# EAGLE board miniframeV2 (EAGLE 5.10)
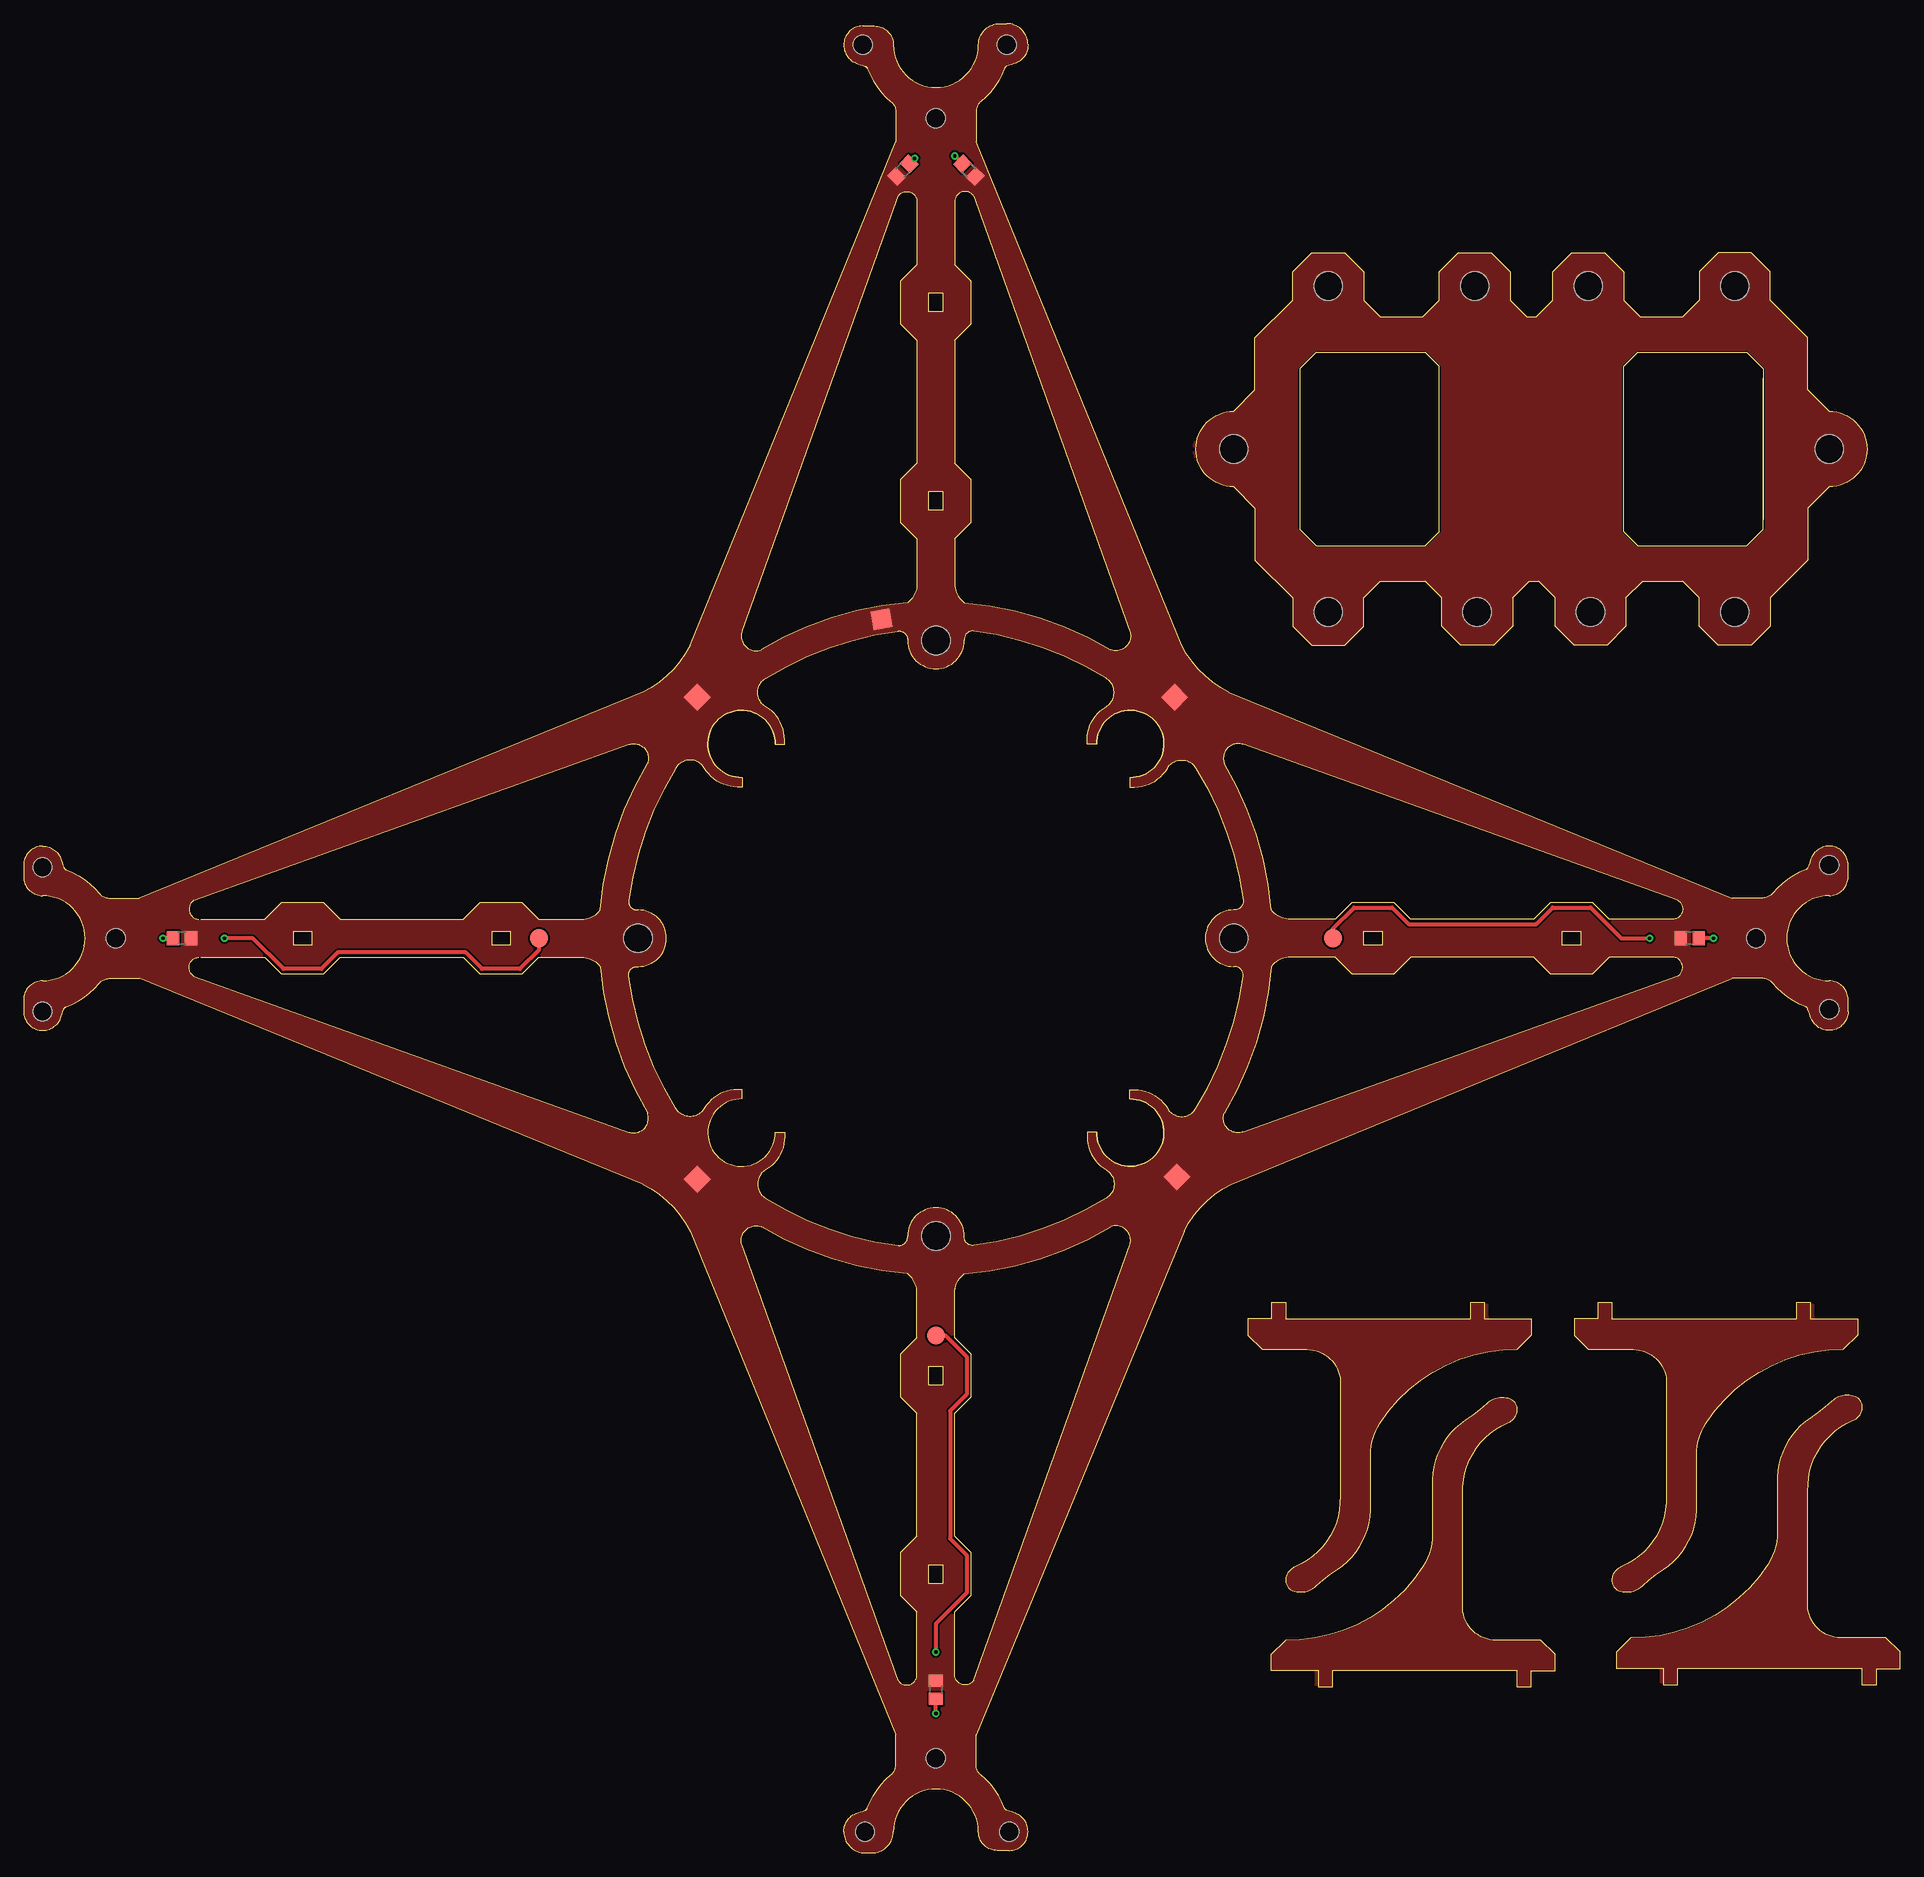
[diagram p0: board, top side]
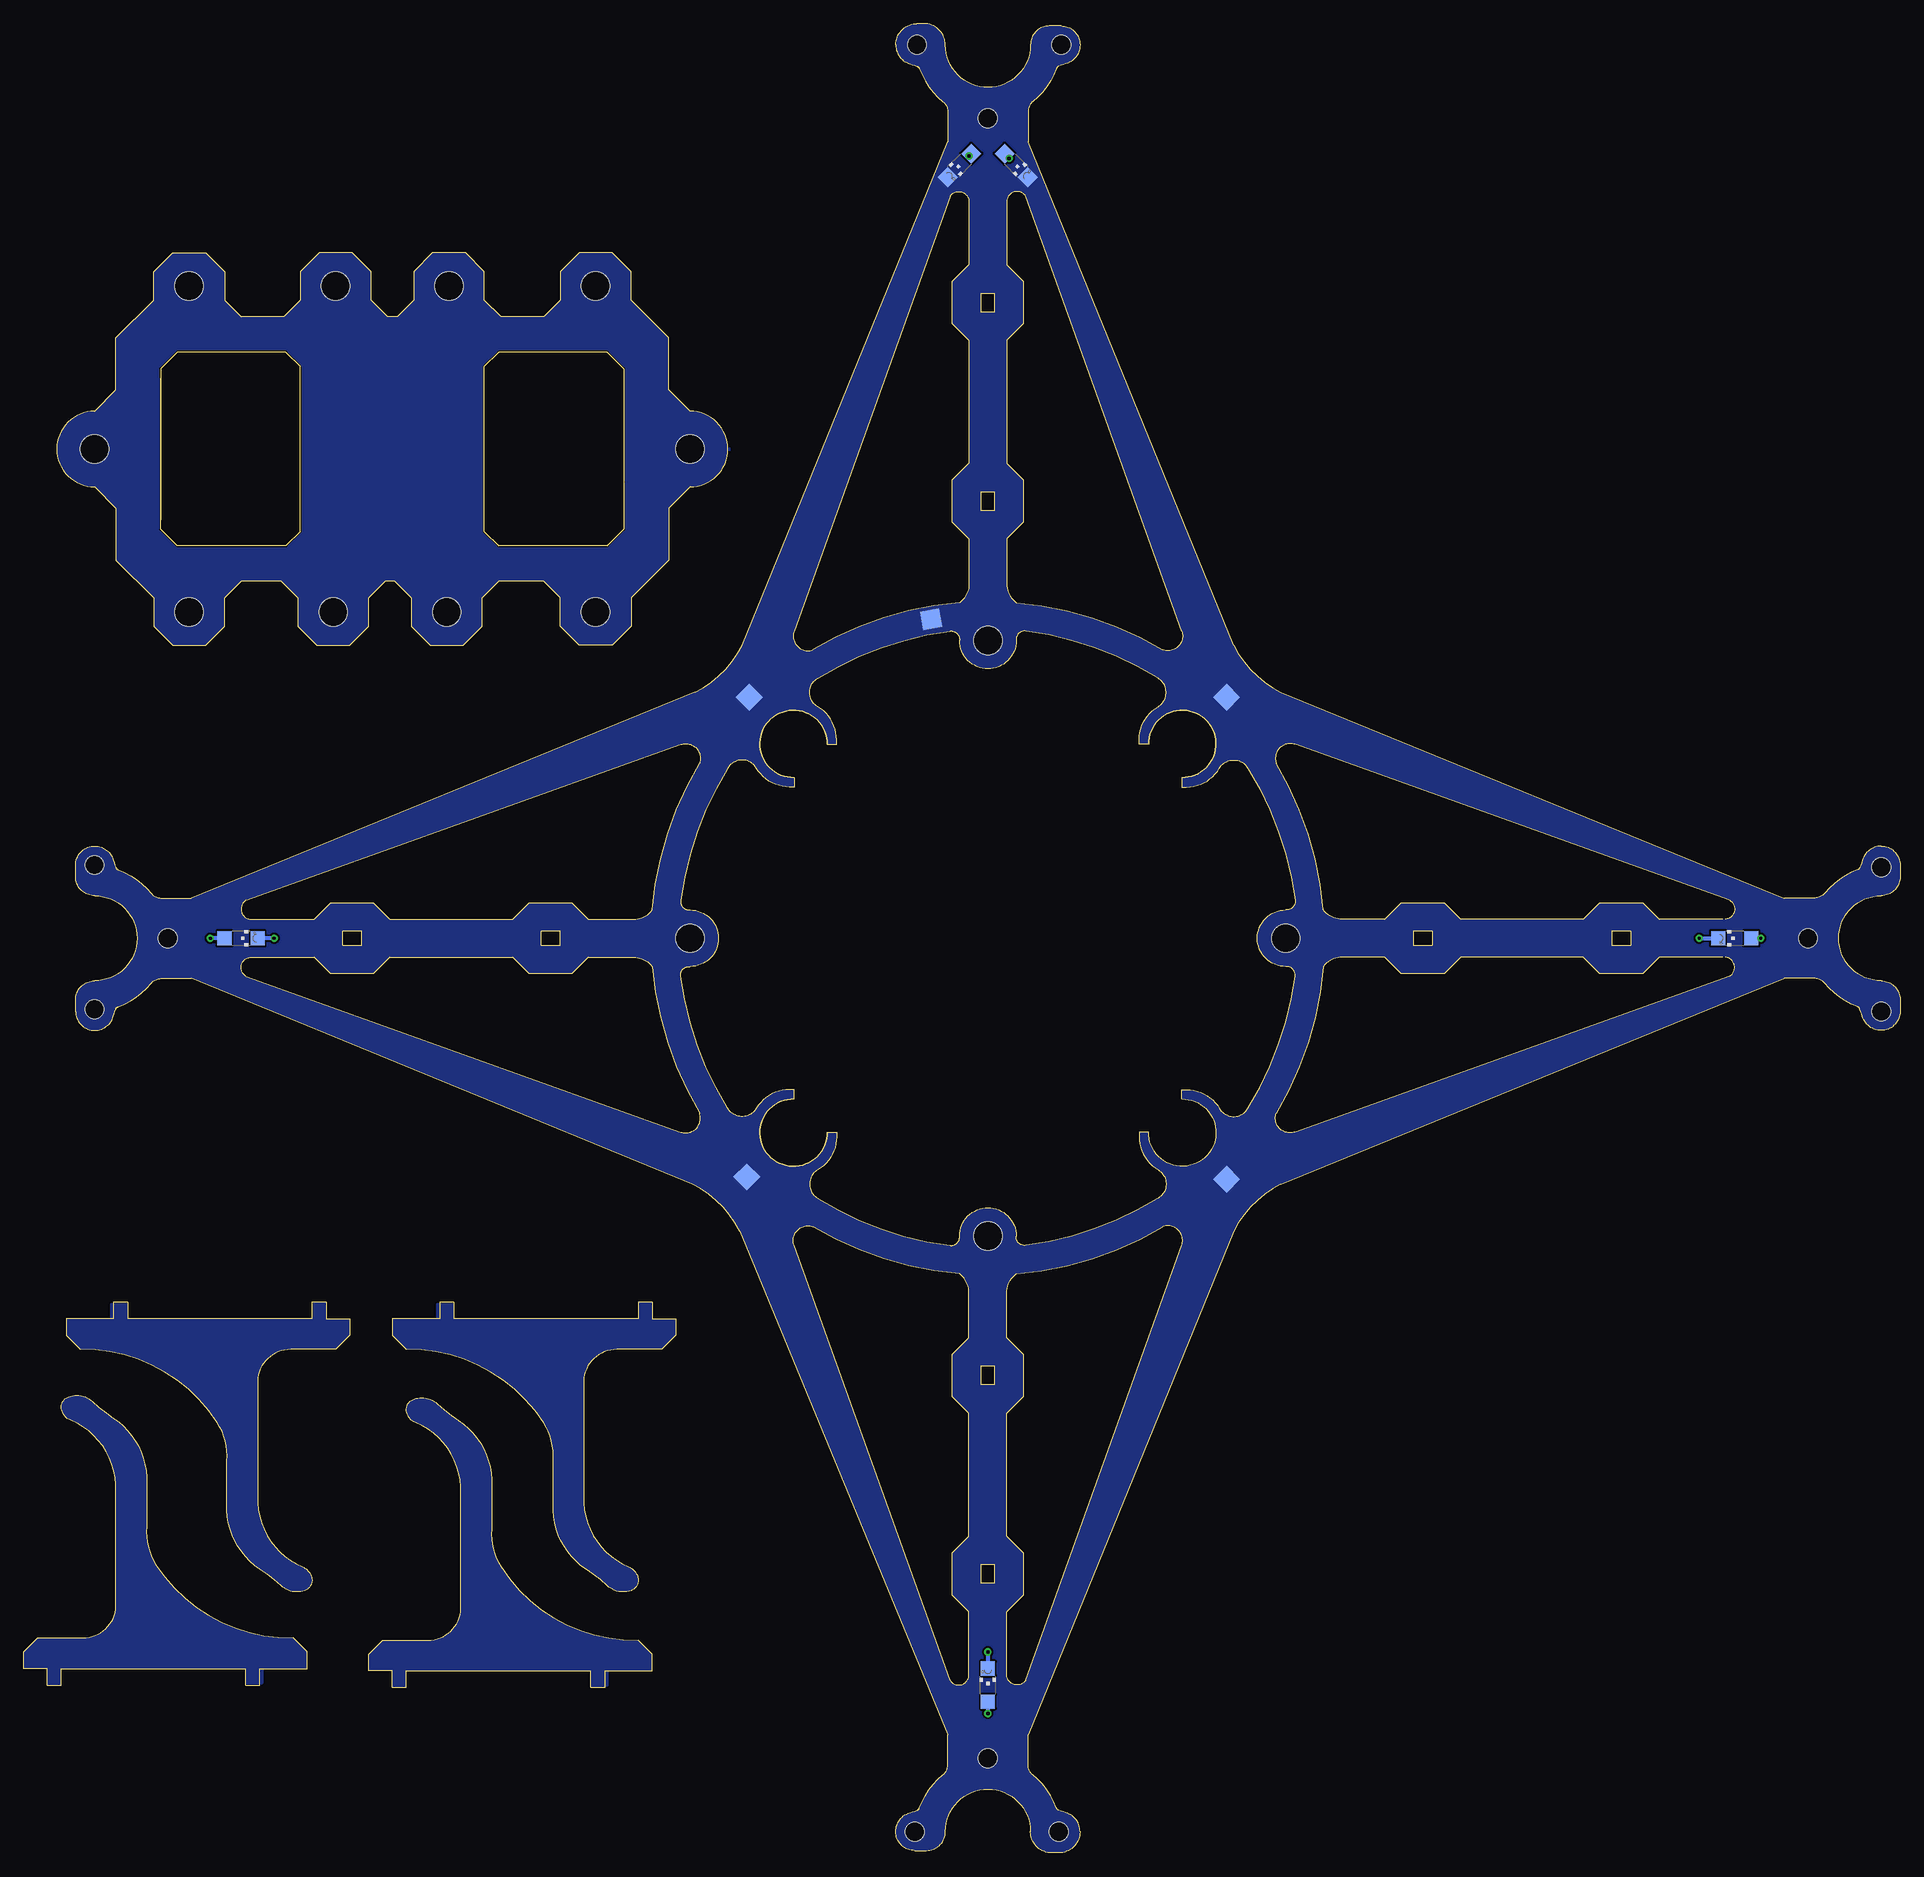
[diagram p1: board, bottom side, seen from below]

Size 198.5 x 193.5 mm. Coordinates in mm from the lower left corner, seen from the top.
Outline: 76,113.75 arc-272 79.5,117.25
Outline: 18.5,98.75 arc-141 18,100.75 64,117.25 arc-129 66,115.25 arc26 61,99.75 arc-53 59,98.75
Outline: 76,113.75 76,112.75 75.5,112.75 arc-59 72,114.75 arc119 69,114.75 arc24 64,100.75 arc103 65,99.75 arc-180 65,93.75 arc103 64,92.75 arc24 69,78.75 arc119 72,78.75 arc-59 75.5,80.75 76,80.75 76,79.75 arc272 79.5,76.25 80.5,76.25 80.5,75.75 arc-59 78.5,72.25 arc119 78.5,69.25 arc24 92.5,64.25 arc103 93.5,65.25 arc-180 99.5,65.25 arc103 100.5,64.25 arc24 114.5,69.25 arc119 114.5,72.25 arc-59 112.5,75.75 112.5,76.25 113.5,76.25
Outline: 18.5,94.75 arc141 18,92.75 64,76.25 arc129 66,78.25 arc-26 61,93.75 arc53 59,94.75
Outline: 2,87 arc-90 0,89 0,90.25 arc-90 2,92.25 arc180 2,101.25 arc-90 0,103.25 0,104.5 arc-90 2,106.5 arc-74 4,105 arc4 4.25,104.25 arc49 4.5,104 arc-30 8,101.5 arc48 9,101 12.25,101 65.5,122.75 arc36 70.5,127.75 92.25,181 92.25,184.25 arc48 91.75,185.25 arc-30 89.25,188.75 arc49 89,189 arc4 88.25,189.25
Outline: 2,87 arc74 4,88.5
Outline: 113.5,76.25 arc272 117,79.75
Outline: 117,79.75 arc-272 113.5,76.25
Outline: 117,79.75 117,80.75 117.5,80.75 arc-59 121,78.75 arc119 124,78.75 arc24 129,92.75 arc103 128,93.75 arc-180 128,99.75 arc103 129,100.75 arc24 124,114.75 arc119 121,114.75 arc-59 117.5,112.75 117,112.75 117,113.75
Outline: 117,113.75 arc272 113.5,117.25
Outline: 113.5,117.25 arc-272 117,113.75
Outline: 113.5,117.25 112.5,117.25 112.5,117.75 arc-59 114.5,121.25 arc119 114.5,124.25 arc24 100.5,129.25 arc103 99.5,128.25 arc-180 93.5,128.25 arc103 92.5,129.25 arc24 78.5,124.25 arc119 78.5,121.25 arc-59 80.5,117.75 80.5,117.25 79.5,117.25
Outline: 79.5,117.25 arc272 76,113.75
Outline: 191,87 arc90 193,89 193,90.25 arc90 191,92.25 arc-180 191,101.25 arc90 193,103.25 193,104.5 arc90 191,106.5 arc74 189,105 arc-4 188.75,104.25 arc-49 188.5,104 arc30 185,101.5 arc-48 184,101 180.75,101 127.5,122.75 arc-36 122.5,127.75 100.75,181 100.75,184.25 arc-48 101.25,185.25 arc30 103.75,188.75 arc-49 104,189 arc-4 104.75,189.25 arc74 106.25,191.25 arc90 104,193.5 103.25,193.5 arc90 101,191.25 arc-180 92,191.25 arc90 90,193.25 88.75,193.25 arc90 86.75,191.25
Outline: 191,87 arc-74 189,88.5
Outline: 106.25,2.25 arc-90 104.25,0.25 103,0.25 arc-90 101,2.25 arc180 92,2.25 arc-90 89.75,0 89,0 arc-90 86.75,2.25 arc-74 88.25,4.25 arc4 89,4.5 arc49 89.25,4.75 arc-30 91.75,8.25 arc48 92.25,9.25 92.25,12.5 70.5,65.75 arc36 65.5,70.75 12.25,92.5 9,92.5 arc48 8,92 arc-30 4.5,89.5 arc49 4.25,89.25 arc4 4,88.5
Outline: 106.25,2.25 arc74 104.75,4.25
Outline: 86.75,191.25 arc74 88.25,189.25
Outline: 18.75,98.75 25.5,98.75 27.25,100.5 31.75,100.5 33.5,98.75 46.5,98.75 48.25,100.5 52.75,100.5 54.5,98.75 59.25,98.75
Outline: 18.75,94.75 25.5,94.75 27.25,93 31.75,93 33.5,94.75 46.5,94.75 48.25,93 52.75,93 54.5,94.75 59.25,94.75
Outline: 86.75,191.25 arc74 88.25,189.25
Outline: 2,87 arc74 4,88.5
Outline: 106.25,2.25 arc74 104.75,4.25
Outline: 104.75,4.25 arc-4 104,4.5 arc-49 103.75,4.75 arc30 101.25,8.25 arc-48 100.75,9.25 100.75,12.5 122.75,65.75 arc-36 127.75,70.75 180.75,92.5 184,92.5 arc-48 185,92 arc30 188.5,89.5 arc-49 188.75,89.25 arc-4 189,88.5
Outline: 191,87 arc-74 189,88.5
Outline: 184,156 184,140 182.25,138.25 170.75,138.25 169.25,139.75 169.25,157.25 170.75,158.75 182.25,158.75 184,157 184,141
Outline: 92.5,18.25 76,64.25 arc-129 78,66.25 arc26 93.5,61.25 arc-53 94.5,59.25 94.5,54.5 92.75,52.75 92.75,48.25 94.5,46.5 94.5,33.5 92.75,31.75 92.75,27.25 94.5,25.5 94.5,18.75 arc-141 92.5,18.25
Outline: 100.5,18.25 117,64.25 arc129 115,66.25 arc-26 99.5,61.25 arc53 98.5,59.25 98.5,54.5 100.25,52.75 100.25,48.25 98.5,46.5 98.5,33.5 100.25,31.75 100.25,27.25 98.5,25.5 98.5,18.75 arc141 100.5,18.25
Outline: 175,92.75 129,76.25 arc-129 127,78.25 arc26 132,93.75 arc-53 134,94.75 138.75,94.75 140.5,93 145,93 146.75,94.75 159.75,94.75 161.5,93 166,93 167.75,94.75 174.5,94.75 arc-141 175,92.75
Outline: 175,100.75 129,117.25 arc129 127,115.25 arc-26 132,99.75 arc53 134,98.75 138.75,98.75 140.5,100.5 145,100.5 146.75,98.75 159.75,98.75 161.5,100.5 166,100.5 167.75,98.75 174.5,98.75 arc141 175,100.75
Outline: 100.5,175.25 117,129.25 arc-129 115,127.25 arc26 99.5,132.25 arc-53 98.5,134.25 98.5,139 100.25,140.75 100.25,145.25 98.5,147 98.5,160 100.25,161.75 100.25,166.25 98.5,168 98.5,174.75 arc-141 100.5,175.25
Outline: 92.5,175.25 arc-141 94.5,174.75 94.5,168 92.75,166.25 92.75,161.75 94.5,160 94.5,147 92.75,145.25 92.75,140.75 94.5,139 94.5,134.25 arc-53 93.5,132.25 arc26 78,127.25 arc-129 76,129.25 92.5,175.25
Outline: 28.5,97.5 28.5,96 30.5,96 30.5,97.5 28.5,97.5
Outline: 49.5,97.5 49.5,96 51.5,96 51.5,97.5 49.5,97.5
Outline: 95.75,28.5 97.25,28.5 97.25,30.5 95.75,30.5 95.75,28.5
Outline: 95.75,49.5 97.25,49.5 97.25,51.5 95.75,51.5 95.75,49.5
Outline: 164.75,96 164.75,97.5 162.75,97.5 162.75,96 164.75,96
Outline: 143.75,96 143.75,97.5 141.75,97.5 141.75,96 143.75,96
Outline: 97.25,165 95.75,165 95.75,163 97.25,163 97.25,165
Outline: 97.25,144 95.75,144 95.75,142 97.25,142 97.25,144
Outline: 132,58.25 133.5,58.25 133.5,56.5 153,56.5 153,58.25 154.5,58.25 154.5,56.5 159.5,56.5 159.5,54.75 158,53.25 arc58 143.5,45.5 arc38 142.5,41.5 142.5,36.25 arc-54 139,30 arc8 136.75,28.25 arc-63 134.25,27.75 arc-78 133.5,29 arc-62 134.5,30.25 arc69 139.25,37.75 139.25,50.25 arc81 135.75,53.25 131,53.25 129.5,54.75 129.5,56.5 132,56.5 132,58.25
Outline: 128,144.5 130.25,142.25 130.25,136.75 134.25,132.75 134.25,129.75 136.25,127.75 139.75,127.75 141.75,129.75 141.75,132.75 143.5,134.5 148.25,134.5 150,132.75 150,129.75 152,127.75 155.5,127.75 157.5,129.75 157.5,132.75 159.25,134.5 160.25,134.5 162,132.75 162,129.75 164,127.75 167.5,127.75 169.5,129.75 169.5,132.75 171.25,134.5 175.5,134.5 177.25,132.75 177.25,129.75 179.25,127.75 182.75,127.75 184.75,129.75 184.75,132.75 188.75,136.75 188.75,142.25 191,144.5 arc180 191,152.5 188.75,154.75 188.75,160.25 184.75,164.25 184.75,167.25 182.75,169.25 179.25,169.25 177.25,167.25 177.25,164.25 175.5,162.5 171,162.5 169.25,164.25 169.25,167.25 167.25,169.25 163.75,169.25 161.75,167.25 161.75,164.25 160,162.5 159,162.5 157.25,164.25 157.25,167.25 155.25,169.25 151.75,169.25 149.75,167.25 149.75,164.25 148,162.5 143.5,162.5 141.75,164.25 141.75,167.25 139.75,169.25 136.25,169.25 134.25,167.25 134.25,164.25 130.25,160.25 130.25,154.75 128,152.5 arc180 128,144.5
Outline: 136.75,158.75 135,157 135,140 136.75,138.25 148.25,138.25 149.75,139.75 149.75,157.25 148.25,158.75 136.75,158.75
Outline: 159.5,17.5 158,17.5 158,19.25 138.5,19.25 138.5,17.5 137,17.5 137,19.25 132,19.25 132,21 133.5,22.5 arc58 148,30.25 arc38 149,34.25 149,39.5 arc-54 152.5,45.75 arc8 154.75,47.5 arc-63 157.25,48 arc-78 158,46.75 arc-62 157,45.5 arc69 152.25,38 152.25,25.5 arc81 155.75,22.5 160.5,22.5 162,21 162,19.25 159.5,19.25 159.5,17.5
Outline: 166.5,58.25 168,58.25 168,56.5 187.5,56.5 187.5,58.25 189,58.25 189,56.5 194,56.5 194,54.75 192.5,53.25 arc58 178,45.5 arc38 177,41.5 177,36.25 arc-54 173.5,30 arc8 171.25,28.25 arc-63 168.75,27.75 arc-78 168,29 arc-62 169,30.25 arc69 173.75,37.75 173.75,50.25 arc81 170.25,53.25 165.5,53.25 164,54.75 164,56.5 166.5,56.5 166.5,58.25
Outline: 196,17.75 194.5,17.75 194.5,19.5 175,19.5 175,17.75 173.5,17.75 173.5,19.5 168.5,19.5 168.5,21.25 170,22.75 arc58 184.5,30.5 arc38 185.5,34.5 185.5,39.75 arc-54 189,46 arc8 191.25,47.75 arc-63 193.75,48.25 arc-78 194.5,47 arc-62 193.5,45.75 arc69 188.75,38.25 188.75,25.75 arc81 192.25,22.75 197,22.75 198.5,21.25 198.5,19.5 196,19.5 196,17.75
Copper layers (1*16): Top 0.035mm / dielectric 1.5mm / Bottom 0.035mm
Design rules "default *": minimum track width 10mil, minimum drill 24mil, track to track 8mil, track to pad 8mil, pad to pad 8mil, via to via 8mil, smd to smd 8mil, copper to edge 1mil, drill to drill 8mil, minimum pad ring 10mil, minimum via ring 8mil, stop-mask expansion 4mil, vias tented up to drill 0mil, thermal gap 10mil
Holes 3 mm at 65,96.75 96.5,65.25 128,96.75 96.5,128.25 128,148.5 191,148.5 138,165.75 181,165.75 138,131.25 181,131.25 153.5,165.75 165.5,165.75 165.75,131.25 153.75,131.25
Holes 2 mm at 2,104.25 9.75,96.75 2,89 89,2.25 96.5,10 104.25,2.25 191,89.25 183.25,96.75 191,104.5 88.75,191.25 96.5,183.5 104,191.25
tRestrict: area 135,138.2 to 149.8,158.8; area 169.2,138.2 to 184,158.8
bRestrict: area 135,138.2 to 149.8,158.8; area 169.2,138.2 to 184,158.8

## Footprints (pad centres in the part's own frame; a part is rotated, then mirrored left to right if it is on the bottom)
TP20SQ = smd 2 x 2: TP 0,0
CHIPLED_1206 = smd 1.5 x 1.5: A 0,-1.75; C 0,1.75
R0805 = smd 1.3 x 1.5: 1 -0.95,0; 2 0.95,0
TP19R = smd 1.9 x 1.9: TP 0,0

## Placement (x,y rotation side)
GND  TPTP20SQ  [TP20SQ]  102.5,130.5 10 bottom
GND4  TPTP20SQ  [TP20SQ]  71.25,71.25 45 bottom
GND5  TPTP20SQ  [TP20SQ]  122,71.5 45 bottom
GND6  TPTP20SQ  [TP20SQ]  121.75,122.25 45 bottom
GND7  TPTP20SQ  [TP20SQ]  71.25,122.25 45 bottom
LB  [CHIPLED_1206]  96.5,17.75 0 bottom
LF1  [CHIPLED_1206]  93.5,178.5 225 bottom
LF2  [CHIPLED_1206]  99.5,178.5 135 bottom
LL  [CHIPLED_1206]  175.5,96.75 270 bottom
LR  [CHIPLED_1206]  17.5,96.75 90 bottom
R1  330R  [R0805]  100,178 315 top
R2  330R  [R0805]  93,178 225 top
R3  330R  [R0805]  16.75,96.75 0 top
R4  330R  [R0805]  176.25,96.75 180 top
R5  330R  [R0805]  96.5,17.25 90 top
TLB  TPSQTP19R  [TP19R]  96.5,54.75 0 top
TLL  TPSQTP19R  [TP19R]  138.5,96.75 0 top
TLR  TPSQTP19R  [TP19R]  54.5,96.75 0 top
VCC  TPTP20SQ  [TP20SQ]  90.75,130.5 100 top
VCC1  TPTP20SQ  [TP20SQ]  71.25,71.25 45 top
VCC2  TPTP20SQ  [TP20SQ]  122,71.5 45 top
VCC3  TPTP20SQ  [TP20SQ]  121.75,122.25 45 top
VCC4  TPTP20SQ  [TP20SQ]  71.25,122.25 45 top

## Library data of the parts
GND GND4-GND7 TLB TLL TLR VCC VCC1-VCC4 = testpad
LB LF1 LF2 LL LR = led
R1-R5 = rcl

## Nets
GND: GND4.TP GND5.TP GND6.TP GND7.TP GND.TP LF1.C LF2.C
LB: LB.C TLB.TP
LL: LL.C TLL.TP
LR: LR.C TLR.TP
N$1: LF1.A R2.1
N$2: LF2.A R1.1
N$3: LR.A R3.1
N$4: LL.A R4.1
N$5: LB.A R5.1
VCC: R1.2 R2.2 R3.2 R4.2 R5.2 VCC1.TP VCC2.TP VCC3.TP VCC4.TP VCC.TP

## Tracks (layer width: path | path; a pad name or v marks a point on that pad's centre or on a via)
GND
  pour Bottom (no thermals): -25.75,217 -25.75,-9.75 222.5,-9.75 222.5,214.5 122.5,214.5
LB  (via drill 0.36)
  Top 0.406: v96.5,21.25 96.5,24.25 99.75,27.5 99.75,31.5 98,33.25 98,46.75 99.75,48.5 99.75,52.5 97.5,54.75 TLB.TP
  Bottom 0.406: v96.5,21.25 LB.C
LL  (via drill 0.36)
  Top 0.406: v172,96.75 169,96.75 165.75,100 161.75,100 160,98.25 146.5,98.25 144.75,100 140.75,100 138.5,97.75 TLL.TP
  Bottom 0.406: v172,96.75 LL.C
LR  (via drill 0.36)
  Top 0.406: v21.25,96.75 24.25,96.75 27.5,93.5 31.5,93.5 33.25,95.25 46.75,95.25 48.5,93.5 52.5,93.5 54.5,95.5 TLR.TP
  Bottom 0.406: v21.25,96.75 LR.C
N$1  (via drill 0.36)
  Top 0.406: R2.1 v94.25,179.25 | v94.25,179.25
  Bottom 0.406: v94.25,179.25 LF1.A
N$2  (via drill 0.36)
  Top 0.406: R1.1 v98.5,179.5 | v98.5,179.5
  Bottom 0.406: v98.5,179.5 LF2.A
N$3  (via drill 0.36)
  Top 0.406: v14.75,96.75 R3.1
  Bottom 0.406: LR.A v14.75,96.75
N$4  (via drill 0.36)
  Top 0.406: v178.75,96.75 R4.1
  Bottom 0.406: LL.A v178.75,96.75
N$5  (via drill 0.36)
  Top 0.406: v96.5,14.75 R5.1
  Bottom 0.406: LB.A v96.5,14.75
N$6
  pour Bottom: 129.5,56.5 132,56.5 132,58.25 133.25,58.25 133.25,56.5 153,56.5 153,58 154.75,58 154.75,56.5 159.5,56.5 159.5,54.75 158,53.25 157.5,53.25 arc71 142.5,43.25 142.5,37.25 arc-34 140.75,31.5 arc-22 140.25,31 arc6 138.25,29.5 arc-6 136.25,28 arc-78 133.75,28.25 arc-110 134.25,30 arc22 137.5,32.5 arc41 139.25,36.75 arc4 139.25,50 arc70 137,53 arc17 135.5,53.25 arc1 131,53.25 129.5,54.75
  pour Top: 129.5,56.5 132,56.5 132,58.25 133.25,58.25 133.25,56.5 153,56.5 153,58 154.75,58 154.75,56.5 159.5,56.5 159.5,54.75 158,53.25 157.5,53.25 arc71 142.5,43.25 142.5,37.25 arc-34 140.75,31.5 arc-22 140.25,31 arc6 138.25,29.5 arc-6 136.25,28 arc-78 133.75,28.25 arc-110 134.25,30 arc22 137.5,32.5 arc41 139.25,36.75 arc4 139.25,50 arc70 137,53 arc17 135.5,53.25 arc1 131,53.25 129.5,54.75
N$7
  pour Bottom: 128,152.5 130.25,154.75 130.25,160.25 134.25,164.25 134.25,167.25 136.25,169.25 139.75,169.25 141.75,167.25 141.75,164.25 143.5,162.5 148,162.5 149.75,164.25 149.75,167 152,169.25 155.25,169.25 157.25,167.25 157.25,164.25 159,162.5 160,162.5 161.75,164.25 161.75,167.25 163.75,169.25 167.25,169.25 169.25,167.25 169.25,164.25 171,162.5 175.5,162.5 177.25,164.25 177.25,167.25 179.25,169.25 182.75,169.25 184.75,167.25 184.75,164.25 188.75,160.25 188.75,154.75 191,152.5 arc-180 191,144.5 188.75,142.25 188.75,136.75 184.75,132.75 184.75,129.75 182.75,127.75 179.25,127.75 177.25,129.75 177.25,132.75 175.5,134.5 171.25,134.5 169.5,132.75 169.5,129.75 167.5,127.75 164,127.75 162,129.75 162,132.75 160.25,134.5 159.25,134.5 157.5,132.75 157.5,129.75 155.5,127.75 152,127.75 150,129.75 150,132.75 148.25,134.5 143.5,134.5 141.75,132.75 141.75,129.75 139.75,127.75 136.25,127.75 134.25,129.75 134.25,132.75 130.25,136.75 130.25,142.25 128,144.5 arc-184
  pour Top: 128,152.5 130.25,154.75 130.25,160.25 134.25,164.25 134.25,167.25 136.25,169.25 139.75,169.25 141.75,167.25 141.75,164.25 143.5,162.5 148,162.5 149.75,164.25 149.75,167 152,169.25 155.25,169.25 157.25,167.25 157.25,164.25 159,162.5 160,162.5 161.75,164.25 161.75,167.25 163.75,169.25 167.25,169.25 169.25,167.25 169.25,164.25 171,162.5 175.5,162.5 177.25,164.25 177.25,167.25 179.25,169.25 182.75,169.25 184.75,167.25 184.75,164.25 188.75,160.25 188.75,154.75 191,152.5 arc-180 191,144.5 188.75,142.25 188.75,136.75 184.75,132.75 184.75,129.75 182.75,127.75 179.25,127.75 177.25,129.75 177.25,132.75 175.5,134.5 171.25,134.5 169.5,132.75 169.5,129.75 167.5,127.75 164,127.75 162,129.75 162,132.75 160.25,134.5 159.25,134.5 157.5,132.75 157.5,129.75 155.5,127.75 152,127.75 150,129.75 150,132.75 148.25,134.5 143.5,134.5 141.75,132.75 141.75,129.75 139.75,127.75 136.25,127.75 134.25,129.75 134.25,132.75 130.25,136.75 130.25,142.25 128,144.5 arc-184
N$8
  pour Bottom: 162,19.25 159.5,19.25 159.5,17.5 158.25,17.5 158.25,19.25 138.5,19.25 138.5,17.75 136.75,17.75 136.75,19.25 132,19.25 132,21 133.5,22.5 134,22.5 arc71 149,32.5 149,38.5 arc-34 150.75,44.25 arc-22 151.25,44.75 arc6 153.25,46.25 arc-6 155.25,47.75 arc-78 157.75,47.5 arc-110 157.25,45.75 arc22 154,43.25 arc41 152.25,39 arc4 152.25,25.75 arc70 154.5,22.75 arc17 156,22.5 arc1 160.5,22.5 162,21
  pour Top: 162,19.25 159.5,19.25 159.5,17.5 158.25,17.5 158.25,19.25 138.5,19.25 138.5,17.75 136.75,17.75 136.75,19.25 132,19.25 132,21 133.5,22.5 134,22.5 arc71 149,32.5 149,38.5 arc-34 150.75,44.25 arc-22 151.25,44.75 arc6 153.25,46.25 arc-6 155.25,47.75 arc-78 157.75,47.5 arc-110 157.25,45.75 arc22 154,43.25 arc41 152.25,39 arc4 152.25,25.75 arc70 154.5,22.75 arc17 156,22.5 arc1 160.5,22.5 162,21
N$9
  pour Bottom: 164,56.5 166.5,56.5 166.5,58.25 167.75,58.25 167.75,56.5 187.5,56.5 187.5,58 189.25,58 189.25,56.5 194,56.5 194,54.75 192.5,53.25 192,53.25 arc71 177,43.25 177,37.25 arc-34 175.25,31.5 arc-22 174.75,31 arc6 172.75,29.5 arc-6 170.75,28 arc-78 168.25,28.25 arc-110 168.75,30 arc22 172,32.5 arc41 173.75,36.75 arc4 173.75,50 arc70 171.5,53 arc17 170,53.25 arc1 165.5,53.25 164,54.75
  pour Top: 164,56.5 166.5,56.5 166.5,58.25 167.75,58.25 167.75,56.5 187.5,56.5 187.5,58 189.25,58 189.25,56.5 194,56.5 194,54.75 192.5,53.25 192,53.25 arc71 177,43.25 177,37.25 arc-34 175.25,31.5 arc-22 174.75,31 arc6 172.75,29.5 arc-6 170.75,28 arc-78 168.25,28.25 arc-110 168.75,30 arc22 172,32.5 arc41 173.75,36.75 arc4 173.75,50 arc70 171.5,53 arc17 170,53.25 arc1 165.5,53.25 164,54.75
N$10
  pour Bottom: 198.5,19.5 196,19.5 196,17.75 194.75,17.75 194.75,19.5 175,19.5 175,18 173.25,18 173.25,19.5 168.5,19.5 168.5,21.25 170,22.75 170.5,22.75 arc71 185.5,32.75 185.5,38.75 arc-34 187.25,44.5 arc-22 187.75,45 arc6 189.75,46.5 arc-6 191.75,48 arc-78 194.25,47.75 arc-110 193.75,46 arc22 190.5,43.5 arc41 188.75,39.25 arc4 188.75,26 arc70 191,23 arc17 192.5,22.75 arc1 197,22.75 198.5,21.25
  pour Top: 198.5,19.5 196,19.5 196,17.75 194.75,17.75 194.75,19.5 175,19.5 175,18 173.25,18 173.25,19.5 168.5,19.5 168.5,21.25 170,22.75 170.5,22.75 arc71 185.5,32.75 185.5,38.75 arc-34 187.25,44.5 arc-22 187.75,45 arc6 189.75,46.5 arc-6 191.75,48 arc-78 194.25,47.75 arc-110 193.75,46 arc22 190.5,43.5 arc41 188.75,39.25 arc4 188.75,26 arc70 191,23 arc17 192.5,22.75 arc1 197,22.75 198.5,21.25
VCC
  pour Top (no thermals): -26.75,212.5 -26.75,-14.25 221.5,-14.25 221.5,210 121.5,210